# EAGLE board Blend V2.0 20170309 (EAGLE 6.6.0)
00: 00
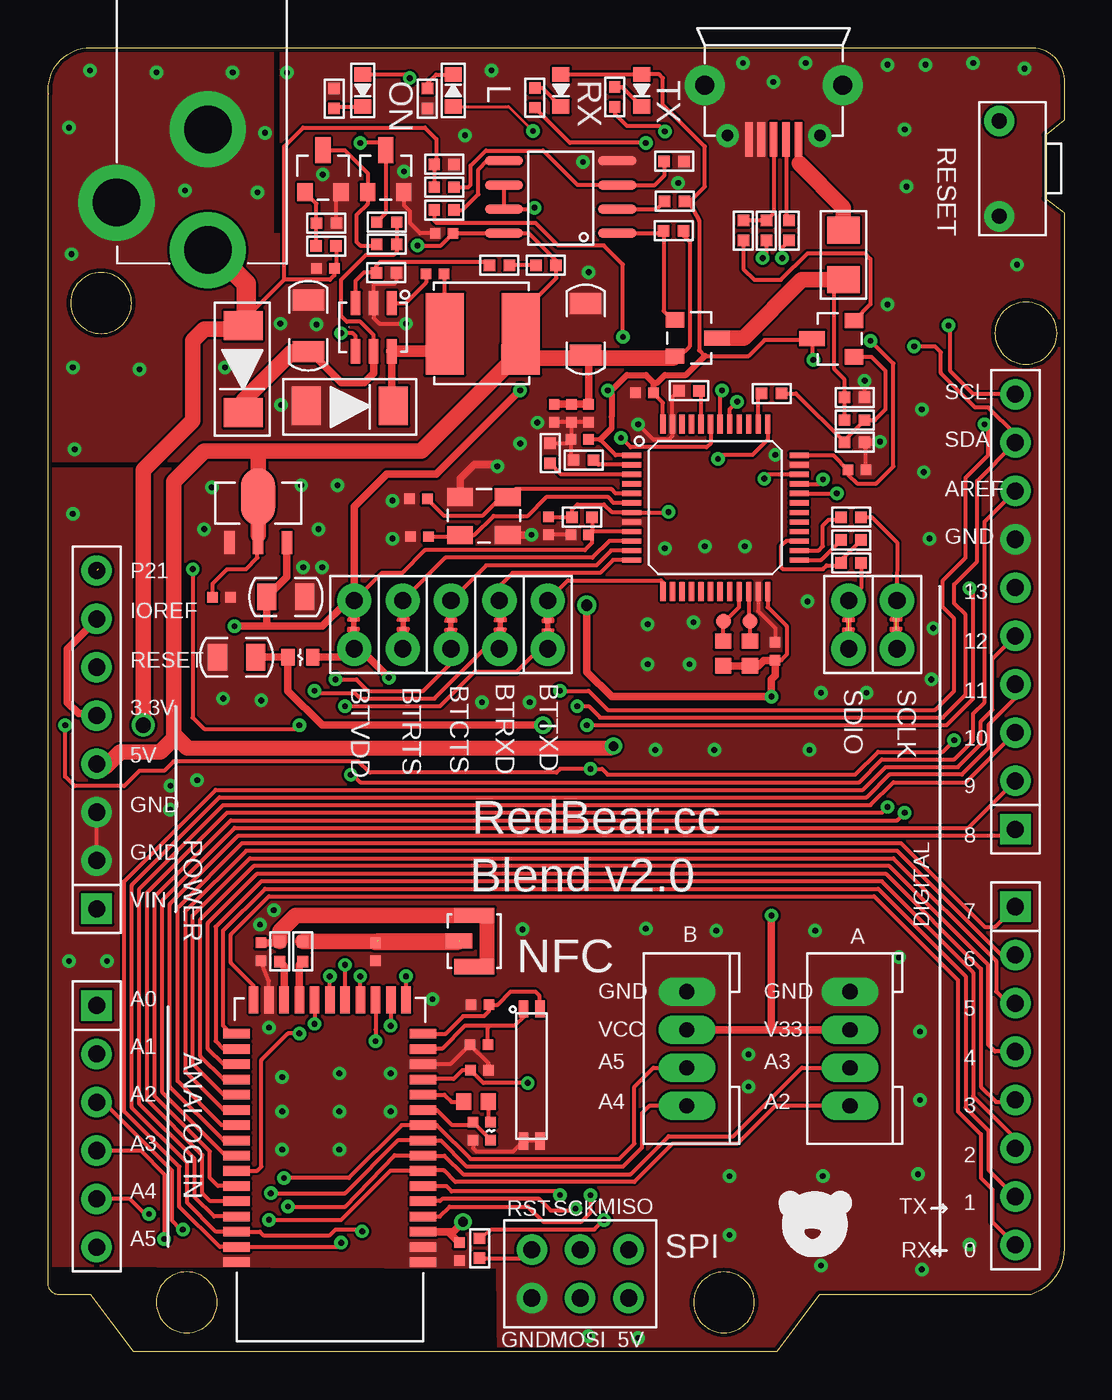
[diagram p0: board, top side]
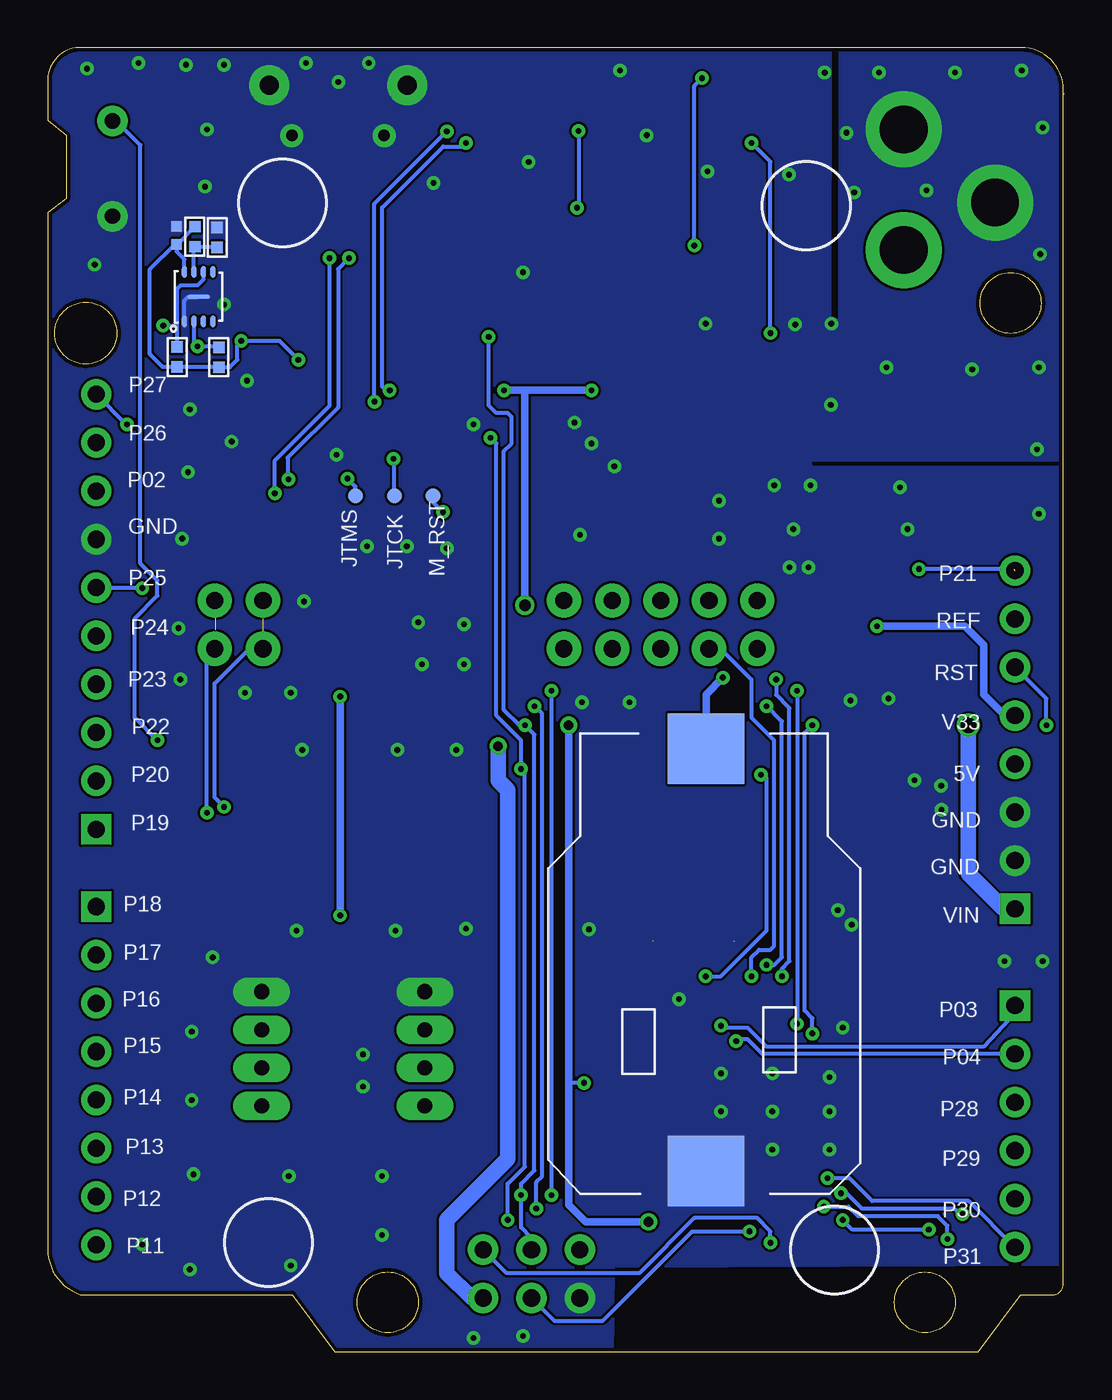
[diagram p1: board, bottom side, seen from below]

Size 53.4 x 68.54 mm. Coordinates in mm from the lower left corner, seen from the top.
Outline: 0.02,66.13 0.05,66.13 0,66.13
Outline: 0.63,3 arc-90 0.03,3.58 0.03,66.32 arc-90 2.25,68.54 51.75,68.54 arc-90 53.4,66.72 53.4,64.74 52.43,63.95 52.43,60.6 53.4,59.87 53.4,5.42 arc-72 51.67,3.01 40.55,3.01 38.31,0 4.52,0 2.27,3 0.63,3
Outline: 1.21,55.12 arc180 4.41,55.12 arc180 1.21,55.12
Outline: 49.76,53.54 arc180 53.03,53.54 arc180 49.76,53.54
Outline: 8.91,2.6 arc180 5.71,2.6 arc180 8.91,2.6
Outline: 37.13,2.6 arc180 33.93,2.6 arc180 37.13,2.6
Copper layers (1*16): Top 0.035mm / dielectric 1.5mm / Bottom 0.035mm
Design rules "MB-N2规则 *": minimum track width 5mil, minimum drill 11mil, track to track 5mil, track to pad 6mil, pad to pad 6mil, via to via 8mil, smd to smd 6mil, copper to edge 8mil, drill to drill 8mil, minimum pad ring 10mil, minimum via ring 8mil, stop-mask expansion 0mil, vias tented up to drill 0.45mm, thermal gap 8mil

## Footprints (pad centres in the part's own frame; a part is rotated, then mirrored left to right if it is on the bottom)
CONETER-4-2.0 = drill 0.8 pad 1.5 long: 1 -3,0; 2 -1,0; 3 1,0; 4 3,0
BAT = smd 3.7 x 4: P$1 -11.1,0; P$2 11.1,0
SIP-2 = drill 0.9 pad 1.8: 1 -1.27,0; 2 1.27,0
C-0402 = smd 0.55 x 0.55: 1 -0.47,0; 2 0.47,0
C0805 = smd 1 x 1.4: 1 -1,0; 2 1,0
C1206 = smd 1.1 x 1.65: 1 -1.35,0; 2 1.35,0
LED-0603 = smd 0.762 x 0.889: 1 -0.85,0; 2 0.85,0
D-1810 = smd 1.524 x 2.032: 1 -2.29,0; 2 2.29,0
PAIZHEN3X2PIN2.54 = drill 0.9 pad 1.6: 1 -2.54,-1.27; 2 0,-1.27; 3 2.54,-1.27; 4 2.54,1.27; 5 0,1.27; 6 -2.54,1.27
DC-005 = drill 2.5 pad 4: P$1 0,0.7; P$2 0,7.05; P$3 -4.8,3.2
PAIZHEN8P_2.54AA = drill 0.9 pad 1.6 square: 1 0,0 | drill 0.9 pad 1.6: 2 0,-2.54; 3 0,-5.08; 4 0,-7.62; 5 0,-10.16; 6 0,-12.7; 7 0,-15.24; 8 0,-17.78
PAIZHEN6P_2.54AA = drill 0.9 pad 1.6 square: 1 0,0 | drill 0.9 pad 1.6: 2 0,-2.54; 3 0,-5.08; 4 0,-7.62; 5 0,-10.16; 6 0,-12.7
PAIZHEN10P-2.54A = drill 0.9 pad 1.6 square: 1 0,0 | drill 0.9 pad 1.6: 2 0,-2.54; 3 0,-5.08; 4 0,-7.62; 5 0,-10.16; 6 0,-12.7; 7 0,-15.24; 8 0,-17.78; 9 0,-20.32; 10 0,-22.86
TP = smd 0.8 x 0.8: P$1 0,0
K2-1101F = drill 0.8 pad 1.6: 1 -2.5,1.05; 2 2.5,1.05
R0603 = smd 0.8 x 0.85: 1 -0.65,0; 2 0.65,0
R-0402S = smd 0.55 x 0.55: 1 -0.47,0; 2 0.47,0
L4X4 = smd 4.3 x 2: P$1 0,2; P$2 0,-2
R-0603A = smd 0.7 x 0.85: 1 -0.65,0; 2 0.65,0
MP2359 = smd 1.27 x 0.508: 1 -1.27,0.953; 2 -1.27,0; 3 -1.27,-0.953; 4 1.27,-0.953; 5 1.27,0; 6 1.27,0.953
IPEX = smd 0.8 x 1.4: 1 0,-0.8 | smd 0.8 x 2.1: 2 1.35,0; 3 -1.35,0
SOT-23 = smd 0.8 x 0.95: 1 -0.97,-0.9; 2 0.93,-0.9 | smd 0.8 x 1.35: 3 -0.018,1.301
R0402 = smd 0.6 x 0.6: 1 -0.525,0; 2 0.525,0
R1206A = smd 1.4 x 1.7: 1 -1.3,0; 2 1.3,0
LED0603 = smd 0.762 x 0.889: 1 -0.85,0; 2 0.85,0
TP_OPEN = smd 0.35 x 0.35: P$1 -0.32,0; P$2 0.32,0
LQFP-48-7X7 = smd 1 x 0.27: 1 -4.4,2.75; 2 -4.4,2.25; 3 -4.4,1.75; 4 -4.4,1.25; 5 -4.4,0.75; 6 -4.4,0.25; 7 -4.4,-0.25; 8 -4.4,-0.75; 9 -4.4,-1.25; 10 -4.4,-1.75; 11 -4.4,-2.25; 12 -4.4,-2.75; 25 4.4,-2.75; 26 4.4,-2.25; 27 4.4,-1.75; 28 4.4,-1.25; 29 4.4,-0.75; 30 4.4,-0.25; 31 4.4,0.25; 32 4.4,0.75; 33 4.4,1.25; 34 4.4,1.75; 35 4.4,2.25; 36 4.4,2.75 | smd 0.27 x 1: 13 -2.75,-4.4; 14 -2.25,-4.4; 15 -1.75,-4.4; 16 -1.25,-4.4; 17 -0.75,-4.4; 18 -0.25,-4.4; 19 0.25,-4.4; 20 0.75,-4.4; 21 1.25,-4.4; 22 1.75,-4.4; 23 2.25,-4.4; 24 2.75,-4.4; 37 2.75,4.4; 38 2.25,4.4; 39 1.75,4.4; 40 1.25,4.4; 41 0.75,4.4; 42 0.25,4.4; 43 -0.25,4.4; 44 -0.75,4.4; 45 -1.25,4.4; 46 -1.75,4.4; 47 -2.25,4.4; 48 -2.75,4.4
RBT07 = smd 1.4 x 0.5: 1 -0.649,13.085; 2 -0.649,12.285; 3 -0.649,11.485; 4 -0.649,10.685; 5 -0.649,9.885; 6 -0.649,9.085; 7 -0.649,8.285; 8 -0.649,7.485; 9 -0.649,6.685; 10 -0.649,5.885; 11 -0.649,5.085; 12 -0.649,4.285; 13 -0.649,3.485; 14 -0.649,2.685; 15 -0.649,1.885; 16 -0.649,1.085; 28 9.151,1.085; 29 9.151,1.885; 30 9.151,2.685; 31 9.151,3.485; 32 9.151,4.285; 33 9.151,5.085; 34 9.151,5.885; 35 9.151,6.685; 36 9.151,7.485; 37 9.151,8.285; 38 9.151,9.085; 39 9.151,9.885; 40 9.151,10.685; 41 9.151,11.485; 42 9.151,12.285; 43 9.151,13.085 | smd 0.5 x 1.4: 17 0.251,-0.7; 18 1.051,-0.7; 19 1.851,-0.7; 20 2.651,-0.7; 21 3.451,-0.7; 22 4.251,-0.7; 23 5.051,-0.7; 24 5.851,-0.7; 25 6.651,-0.7; 26 7.451,-0.7; 27 8.251,-0.7
CRY_7015_SMT = smd 0.9 x 0.5: 1 -3.52,-0.425; 2 3.42,-0.425; 3 3.42,0.425; 4 -3.52,0.425
USON8_A = smd 0.6 x 0.25: 1 -1.3,0.75; 2 -1.3,0.25; 3 -1.3,-0.25; 4 -1.3,-0.75; 5 1.3,-0.75; 6 1.3,-0.25; 7 1.3,0.25; 8 1.3,0.75 | smd 0.22 x 1.2: 9 0,0
MICRO_USB = smd 0.4 x 1.8: 1 1.3,0; 2 0.65,0; 3 0,0; 4 -0.65,0; 5 -1.3,0 | drill 0.6 pad 1.2: 6 2.425,0.2; 9 -2.425,0.2 | drill 1 pad 2.1: 7 3.625,2.85; 8 -3.625,2.85
SOT-89 = smd 0.55 x 1.2: 1 -1.5,-1.9; 3 1.5,-1.9 | smd 0.55 x 2: 2 0,-1.5 | smd 1.8 x 3: 4 0,0.5
SOP-8 = smd 2 x 0.5: 1 -2.97,1.905; 2 -2.97,0.635; 3 -2.97,-0.635; 4 -2.97,-1.905; 5 2.97,-1.905; 6 2.97,-0.635; 7 2.97,0.635; 8 2.97,1.905
CRY_3225_SMT = smd 1.35 x 0.95: 1 -1.25,-1; 2 1.25,-1; 3 1.25,1; 4 -1.25,1

## Placement (x,y rotation side)
A  SIP-42.0  [CONETER-4-2.0]  42.15,15.93 90 top
B  SIP-42.0  [CONETER-4-2.0]  33.58,15.93 90 top
BAT  BAT  [BAT]  18.81,20.6 270 bottom
BT-VDD  SIP-22.54  [SIP-2]  16.11,38.22 90 top
C1  1uF  [C-0402]  22.36,11.61 90 top
C2  0.1uF  [C-0402]  22.7,14.81 0 top
C3  15p  [C-0402]  22.66,16.15 0 top
C4  15p  [C-0402]  22.71,18.25 180 top
C5  nc  [C-0402]  11.21,21.03 90 top
C6  nc  [C-0402]  17.21,21.04 270 top
C7  0.1uF  [C-0402]  21.63,5.27 270 top
C8  0.1uF  [C-0402]  46.62,58.67 270 bottom
C9  4.7uF  [C-0402]  27.95,47.95 0 top
C10  10uF  [C0805]  12.52,39.67 0 top
C11  20p  [C-0402]  19.48,44.83 180 top
C12  20p  [C-0402]  19.54,42.85 0 top
C13  0.1uF  [C-0402]  26.31,43.41 90 top
C14  0.1uF  [C-0402]  27.95,42.95 180 top
C15  0.1uF  [C-0402]  38.21,36.83 270 top
C16  0.1uF  [C-0402]  42.52,46.35 0 top
C17  0.1uF  [C-0402]  9.13,39.65 0 top
C18  47uF  [C1206]  28.27,53.73 270 top
C19  10nF  [C-0402]  20.36,56.65 0 top
C20  0.1uF  [C-0402]  28.41,49.33 90 top
C21  100pF  [C-0402]  27.52,49.33 90 top
C22  33pF  [C-0402]  26.62,49.33 90 top
C23  22uF  [C0805]  9.93,36.51 180 top
C24  0.1uF  [C-0402]  14.59,56.95 0 top
C25  0.1uF  [C-0402]  31.35,50.39 180 top
C26  1uF  [C-0402]  20.84,58.79 0 top
C41  10uF  [C1206]  13.7,53.93 90 top
D1  LAN  [LED-0603]  21.31,66.29 90 top
D3  IN5819  [D-1810]  15.87,49.71 0 top
D4  green  [LED-0603]  16.55,66.29 270 top
HEAD-2*1  HEAD-23  [PAIZHEN3X2PIN2.54]  27.98,4.1 0 top
IN5819  D2  [D-1810]  10.27,51.64 270 top
J5  DC-JACK-3P  [DC-005]  8.42,57.2 0 top
J6  SIP-8SIP-8AA  [PAIZHEN8P_2.54AA]  50.84,23.4 0 top
J7  SIP-6SIP-6AA  [PAIZHEN6P_2.54AA]  2.58,18.2 0 top
J8  SIP-1010P_2.54A  [PAIZHEN10P-2.54A]  50.84,27.47 180 top
J9  SIP-8SIP-8AA  [PAIZHEN8P_2.54AA]  2.58,23.28 180 top
JTCK  TPTP  [TP]  35.17,44.99 0 bottom
JTMS  TPTP  [TP]  37.23,44.99 0 bottom
K-1  K-1811  [K2-1101F]  48.94,62.18 270 top
L1  10uH  [R0603]  22.5,13.16 180 top
L2  15nH  [R-0402S]  23.27,11.61 90 top
L3  4.7UH  [L4X4]  22.86,53.5 90 top
L20  10uH  [R-0603A]  13.27,36.51 0 top
M_RST  TPTP  [TP]  33.16,44.99 0 bottom
MP2359  MP2359  [MP2359]  17.13,53.85 270 top
NFC  IPEXIPEX  [IPEX]  22.41,21.59 270 top
NMOS2  Q2  [SOT-23]  17.78,61.85 0 top
NMOS3  Q1  [SOT-23]  14.49,61.85 0 top
Q4  N-MOS  [SOT-23]  41.46,53.26 90 top
Q7  PMOS  [SOT-23]  33.86,53.26 270 top
R1  0R  [R0402]  13.4,21.04 90 top
R2  4.7K NC  [R0402]  44.4,52.27 270 bottom
R3  0R  [R0402]  12.2,21.04 90 top
R4  4.7K NC  [R0402]  46.59,52.29 270 bottom
R5  NC  [R0402]  45.66,58.61 90 bottom
R6  NC  [R0402]  44.5,58.57 270 bottom
R7  10k  [R0402]  28.16,46.87 0 top
R8  nc  [R0402]  26.4,47.23 270 top
R9  10k  [R0402]  28.08,43.87 0 top
R10  NC  [R0603]  35.49,36.71 90 top
R11  NC  [R0603]  36.9,36.71 90 top
R12  100R  [R0402]  42.22,41.47 180 top
R13  100R  [R0402]  42.22,43.87 180 top
R14  100R  [R0402]  42.22,42.67 180 top
R15  10k  [R0402]  29.8,65.95 90 top
R16  10k  [R0402]  25.59,65.91 90 top
R17  4.7k  [R0402]  33.7,50.51 180 top
R18  1.5K  [R0402]  36.55,58.93 270 top
R19  33R  [R0402]  37.76,58.93 270 top
R20  33R  [R0402]  38.95,58.93 270 top
R21  10K  [R0402]  42.4,48.97 180 top
R22  36K  [R0402]  42.4,47.81 180 top
R23  100R  [R0402]  38.03,50.37 180 top
R24  100K  [R0402]  32.88,58.92 0 top
R25  11K  [R0402]  14.63,58.12 180 top
R26  10K  [R0402]  20.84,62.41 0 top
R27  2.7K  [R0402]  14.64,59.32 0 top
R28  100K  [R0402]  17.81,58.21 180 top
R29  100K  [R0402]  17.81,59.37 180 top
R30  0R  [R0402]  26.17,57.11 180 top
R31  49.9K  [R0402]  23.73,57.11 180 top
R32  9.53K  [R0402]  17.8,56.71 0 top
R33  10K  [R0402]  15.05,65.87 90 top
R34  33R  [R0402]  32.94,60.47 180 top
R35  10K  [R0402]  20.84,61.21 0 top
R36  10K  [R0402]  32.91,62.57 180 top
R37  0R  [R0402]  20.84,60.01 0 top
R38  10K  [R0402]  19.95,65.87 90 top
R39  33R  [R0402]  22.7,5.45 270 top
R40  4.7K  [R0402]  42.4,50.16 180 top
RES1  500mA fuse  [R1206A]  41.81,57.65 270 top
RX  GREEN  [LED0603]  26.97,66.29 270 top
S1  SIP-22.54  [SIP-2]  18.65,38.22 90 top
S2  SIP-22.54  [SIP-2]  21.19,38.22 90 top
S3  SIP-22.54  [SIP-2]  23.73,38.22 90 top
S4  SIP-22.54  [SIP-2]  26.27,38.22 90 top
S5  SIP-22.54  [SIP-2]  44.62,38.22 90 top
S6  SIP-22.54  [SIP-2]  42.08,38.22 90 top
S55  TP_OPEN  [TP_OPEN]  16.07,38.23 90 top
T1  TP_OPEN  [TP_OPEN]  18.67,38.23 270 top
T2  TP_OPEN  [TP_OPEN]  21.17,38.19 270 top
T3  TP_OPEN  [TP_OPEN]  23.77,38.21 270 top
T4  TP_OPEN  [TP_OPEN]  26.27,38.17 270 top
T5  TP_OPEN  [TP_OPEN]  44.58,38.25 90 top
T6  TP_OPEN  [TP_OPEN]  42.08,38.21 90 top
TP1  TPTP  [TP]  35.49,38.39 0 top
TP2  TPTP  [TP]  36.9,38.39 0 top
TX  BLUE  [LED0603]  31.22,66.29 270 top
U1  STM32F103LQFP48  [LQFP-48-7X7]  35.08,44.37 0 top
U11  MB-N2  [RBT07]  19.08,17.8 180 top
U$2  CRY_7015  [CRY_7015_SMT]  25.43,14.5 270 top
U$3  APPLE_ICUSON8A  [USON8_A]  45.46,55.45 90 bottom
U$15  MICRO_USBMICRO_USB  [MICRO_USB]  38.14,63.72 0 top
U$16  XC6203SOT89  [SOT-89]  11.06,44.43 0 top
U$19  SGM358  [SOP-8]  26.96,60.69 180 top
Y1  16MH  [CRY_3225_SMT]  22.92,43.93 0 top

## Library data of the parts
A B BAT BT-VDD C10 C18 C23 C41 D1 D3 D4 HEAD-2*1 IN5819 J5-J9 JTCK JTMS K-1 L3 L20 M_RST MP2359 NFC NMOS2 NMOS3 Q4 Q7 R1-R9 R12-R40 RES1 RX S1-S6 S55 T1-T6 TP1 TP2 TX U1 U11 U$2 U$3 U$15 U$16 U$19 Y1 = RedBeard
C1-C9 C11-C17 C19-C22 C24-C26 L1 L2 R10 R11 = Nano2

## Nets
+3V3: A.3 B.3 BT-VDD.2 C8.2 C9.2 C10.1 C14.1 C15.2 C16.1 C25.1 J9.5 J9.7 Q4.3 R2.2 R4.2 R5.2 R9.2 R10.1 R11.1 R34.1 RX.1 S55.P$2 TX.1 U1.1 U1.9 U1.24 U1.36 U1.48 U$3.8 U$16.3
+5V: C17.1 C18.2 C20.2 C21.2 C22.2 C26.2 D4.1 HEAD-2*1.3 J9.4 L3.P$2 Q7.2 R24.2 R30.1 U$16.2 U$19.8
AGND: A.4 B.4 BAT.P$2 C1.1 C2.2 C3.1 C4.2 C5.1 C6.2 C7.2 C8.1 C9.1 C10.2 C11.2 C12.1 C13.1 C14.2 C15.1 C16.2 C17.2 C18.1 C20.1 C21.1 C22.1 C23.2 C24.1 C25.2 C26.1 C41.2 D3.1 HEAD-2*1.1 J5.P$2 J5.P$3 J8.7 J9.2 J9.3 K-1.2 MP2359.2 NMOS2.2 NMOS3.2 R6.1 R7.1 R8.1 R17.2 R22.1 R26.2 R27.2 R32.2 R33.2 R36.1 R38.1 R40.1 U1.8 U1.23 U1.35 U1.47 U11.1 U11.2 U11.14 U11.26 U11.43 U$2.2 U$2.3 U$3.1 U$3.9 U$15.4 U$15.5 U$15.6 U$15.7 U$15.8 U$15.9 U$16.1 U$19.4 Y1.2 Y1.4
CTS/P07: S2.1 T2.P$2 U11.22
DN: R20.2 U1.32
DP: R19.2 U1.33
IN1: U$16.4
M/RST: C13.2 M_RST.P$1 R9.1 U1.7
MP2359: C19.1 MP2359.1
N$1: L1.1 L2.2
N$2: L1.2 U11.12
N$3: C1.2 L2.1 U11.11
N$5: C3.2 U11.15 U$2.1
N$6: C4.1 U11.16 U$2.4
N$7: C5.2 NFC.2 NFC.3 R3.2
N$8: C6.1 NFC.1 R1.2
N$10: R10.2 TP1.P$1 U1.21
N$11: R5.1 R6.2 U$3.7
N$12: C11.1 U1.5 Y1.3
N$13: R7.2 U1.2
N$14: R8.2 U1.3
N$15: C12.2 U1.6 Y1.1
N$17: R11.2 TP2.P$1 U1.22
N$18: Q4.2 R18.2
N$19: Q4.1 R21.1 R22.2 R23.1
N$20: S4.2 T4.P$1 U1.13
N$21: R18.1 R19.1 U$15.3
N$22: R14.2 U1.25
N$23: R15.1 U1.41
N$24: R16.1 U1.42
N$25: R20.1 U$15.2
N$26: R17.1 U1.44
N$29: BAT.P$1 BT-VDD.1 L20.2 S55.P$1
N$30: NMOS3.1 R25.2 R27.1
N$31: RES1.1 U$15.1
N$32: NMOS2.1 NMOS3.3 R28.2
N$33: R34.2 U$19.2
N$34: R35.2 R36.2 U$19.3
N$35: D4.2 R33.1
N$36: MP2359.4 NMOS2.3 R29.2
N$37: D1.1 U$19.6 U$19.7
N$39: MP2359.3 R31.2 R32.1
N$40: R30.2 R31.1
N$41: D1.2 R38.2
N$42: C19.2 D3.2 L3.P$1 MP2359.6
N$43: R37.2 U$19.5
N$45: HEAD-2*1.6 R39.2
P02_AREF: J8.8 U11.17
P03_A0: J7.1 U11.18
P04_A1: J7.2 U11.19
P09: R1.1 U11.24
P10: R3.1 U11.25
P11_D0/RX: J6.8 U11.27
P12_D1/TX: J6.7 U11.28
P13_D2/SDA: J6.6 U11.29
P14_D3/SCL: J6.5 U11.30
P15_D4: J6.4 U11.31
P16_D5: J6.3 U11.32
P17_D6: J6.2 U11.33
P18_D7: J6.1 U11.34
P19_D8: J8.1 U11.35
P20_D9: J8.2 U11.36
P21: J9.8 U11.37
P22_D10: J8.3 U11.40
P23_D11: HEAD-2*1.2 J8.4 U11.41
P24_D12: HEAD-2*1.4 J8.5 U11.42
P25_D13: HEAD-2*1.5 J8.6 R37.1 U11.4
P26_SDA1: J8.9 R2.1 U11.5 U$3.2
P27_SCL1: J8.10 R4.1 U11.6 U$3.6
P28_A2: A.1 J7.3 U11.7
P29_A3: A.2 J7.4 U11.8
P30_A4: B.1 J7.5 U11.9
P31_A5: B.2 J7.6 U11.10
PA0: S1.2 T1.P$1 U1.10
PA1: S2.2 T2.P$1 U1.11
PA2: S3.2 T3.P$1 U1.12
RESET: J9.6 K-1.1 R39.1 U1.43
RTS/P05: S1.1 T1.P$2 U11.20
RX: R16.2 RX.2
RXD/P08: S3.1 T3.P$2 U11.23
SCLK: R13.1 S5.1 S5.2 T5.P$1 T5.P$2 U11.38
SDIO: R12.1 S6.1 S6.2 T6.P$1 T6.P$2 U11.39
STM_JTCK: JTCK.P$1 U1.37
STM_JTMS: JTMS.P$1 U1.34
SWDCLK: R13.2 U1.26
SWDIO: R12.2 R14.1 U1.27
TX: R15.2 TX.2
TXD/P06: S4.1 T4.P$2 U11.21
USB5V: Q7.3 R21.2 R40.2 RES1.2
USB_RENUMN: R23.2 U1.38
USBPON: Q7.1 R24.1 U$19.1
VDD: C2.1 C7.1 C23.1 L20.1 U11.3 U11.13
VIN: C24.2 IN5819.1 J5.P$1 J9.1 R25.1 R26.1 R35.1
VIN+: C41.1 IN5819.2 MP2359.5 R28.1 R29.1

## Tracks (layer width: path | path; a pad name or v marks a point on that pad's centre or on a via)
+3V3  (via drill 0.3 pad 0.61, 0.6 pad 0.61)
  Top 0.2: R34.1 33.76,60.47 | 33.76,60.47 34.52,61.24 34.52,63.34 32.33,65.54 32.33,66.94 32.12,67.14 TX.1 RX.1 | 40.16,53.17 Q4.3 40.16,52.2 v40.23,52.14 | 40.16,53.17 40.12,53.14 | 40.16,53.17 37.66,53.17 36.83,52.34 34.52,52.34 34.23,52.64 34.23,59.44 33.76,60.31 33.76,60.47 | U1.48 32.33,49.89 C25.1 | U1.1 29.84,47.12 29.02,47.94 C9.2 | v29.42,50.54 29.62,50.34 | v43.23,53.14 44.43,51.94 44.43,46.54 43.52,45.64 42.52,45.64 42.05,46.12 C16.1 41.27,47.12 U1.36 | U1.9 28.59,43.12 | 28.59,43.12 28.59,42.51 28.23,42.14 19.82,42.14 18.62,40.94 17.56,40.94 BT-VDD.2 | R9.2 28.6,43.12 28.59,43.12 | 28.59,43.12 C14.1 | U1.24 37.83,39.14 38.83,38.14 38.83,36.64 38.55,36.36 C15.2
  Top 0.3: 29.62,49.15 29.62,48.54 29.02,47.94
  Top 0.305: 29.62,49.15 29.62,50.34 29.62,50.54 30.42,51.34 31.42,51.34 31.83,50.94 | 31.83,50.94 C25.1 | 31.83,50.94 32.02,50.94 32.42,51.34 33.52,51.34 34.52,52.34
  Top 0.406: U$16.3 12.56,40.72 C10.1 11.52,38.23 11.43,38.14 | BT-VDD.2 16.12,38.59 S55.P$2 | v9.82,38.14 11.43,38.14 | 11.43,38.14 14.43,38.14 15.62,39.34 15.96,39.34 BT-VDD.2 | J9.7 2.58,38.49 1.02,36.94 1.02,34.14 1.62,33.54 2.48,33.54 J9.5 | B.3 38.02,16.93 38.02,16.94 38.02,17.14 | 38.02,17.14 v38.02,22.94 | A.3 38.23,16.93 38.02,17.14 | R10.1 R11.1 37.34,36.06 37.62,36.34 38.2,36.34 C15.2 38.23,35.54 38.02,35.34 v38.02,34.44 29.62,34.44 28.33,35.74 v28.33,39.24 | BT-VDD.2 16.12,44.43 17.82,46.14 20.42,46.14 v24.83,50.54
  Bottom 0.2: U$3.8 46.21,57.42 46.62,57.83 C8.2 | C8.2 46.59,58.2 R5.2 | v40.23,52.14 41.23,53.14 v43.23,53.14 43.43,52.94 43.43,52.14 43.82,51.74 R2.2 46.58,51.74 R4.2 47.35,51.76 48.02,52.44 48.02,56.89 46.72,58.2 C8.2
  Bottom 0.406: J9.5 3.13,33.44 4.22,34.54 4.22,37.14 5.22,38.14 v9.82,38.14 | v38.02,22.94 v38.02,34.44 | v24.83,50.54 28.33,50.54 | 28.33,50.54 v29.42,50.54 | v28.33,39.24 28.33,50.54
+5V  (via drill 0.3 pad 0.61, 0.5 pad 0.81)
  Top 0.2: C17.1 8.66,40.38 9.43,41.14 10.43,41.14 11.02,41.74 11.02,42.89 U$16.2 | C26.2 U$19.8 25.28,58.78 26.7,57.36 R30.1 26.73,57.08 26.73,56.44 25.83,55.54 24.92,55.54 24.92,53.56 L3.P$2 | C26.2 21.3,58.86 | D4.1 18.82,67.14 v19.02,66.94 | R24.2 33.41,58.65 33.73,58.34 33.73,52.84 33.22,52.33 Q7.2 | v19.42,58.14 20.66,58.14 C26.2
  Top 0.406: C22.2 C21.2 C20.2 28.41,52.23 C18.2
  Top 0.8: 7.32,31.74 29.62,31.74 v29.73,31.84
  Top 0.813: 3.19,30.9 3.82,31.54 5.92,31.54 6.62,32.24 6.62,32.44 | 3.19,30.9 3.02,30.74 | 24.23,52.34 24.33,52.23 28.41,52.23 32.86,52.23 Q7.2 | 24.23,52.34 24.23,52.86 L3.P$2 | 24.23,52.34 24.23,51.94 19.62,47.34 11.02,47.34 | 6.62,32.44 6.62,45.74 8.22,47.34 11.02,47.34 | J9.4 3.19,30.9 | U$16.2 11.06,47.3 11.02,47.34 | 7.32,31.74 6.62,32.44
  Bottom 0.2: v19.42,58.14 19.42,66.54 v19.02,66.94
  Bottom 0.813: HEAD-2*1.3 31.12,2.83 32.42,4.14 32.42,6.94 29.23,10.14 29.23,29.54 29.73,30.04 v29.73,31.84
AGND  (via drill 0.3 pad 0.55, 0.3 pad 0.61)
  Top 0.15: C24.1 14.12,57.03
  Top 0.2: R32.2 18.32,56.23 18.23,56.14 17.23,56.14 17.13,56.04 MP2359.2 17.13,54.33 17.42,54.04 v18.82,54.04 | U11.14 20.1,15.12 20.12,15.14 21.17,15.14 C3.1 23.16,15.17 C2.2 | C1.1 22.36,10.71 22.52,10.54 24.46,10.54 U$2.2 U$2.3 | U1.23 37.33,38.94 38.23,38.04 C15.1 | C14.2 C13.1 | R17.2 32.83,50.16 U1.47 32.83,48.14 32.62,47.94 31.83,47.94 v31.02,48.74 | C20.1 C21.1 | C21.1 27.52,47.98 C9.1 | C21.1 C22.1 | C9.1 27.48,47.01 R7.1 | R8.1 27.29,47.75 C9.1 | C16.2 42.98,47.74 R22.1 | R40.1 42.92,50.84 v42.93,51.04 | C26.1 19.57,58.79 19.02,59.34 19.02,59.94 18.71,60.25 NMOS2.2 | J9.2 J9.3 | R27.2 15.17,60.7 NMOS3.2 | U11.26 11.63,19.5 C5.1
  Top 0.406: R22.1 43.7,47.81 v43.73,47.84 | Y1.4 21.67,45.88 22.42,46.64 23.52,46.64 v23.62,46.54 | Y1.2 25.23,42.93 v25.42,42.94
  Bottom 0.2: U$3.1 46.21,55.25 46.02,55.44 45.48,55.44 U$3.9
  other vias: 28.42,56.74 12.22,54.04 14.46,61.87 2.22,67.34 5.72,67.24 9.72,67.24 1.12,64.34 1.25,57.69 1.32,51.74 4.82,51.64 1.42,47.44 1.32,44.04 38.12,66.74 36.52,67.74 39.83,67.74 44.12,67.64 46.12,67.64 48.62,67.74 51.33,67.44 45.93,49.54 46.02,46.24 46.33,42.74 36.62,42.34 34.52,42.34 32.42,42.24 20.23,18.54 38.23,47.14 14.12,53.99 45.02,64.24 45.12,61.24 25.73,48.84 24.83,47.74 18.12,44.74 18.12,42.74 13.43,41.24 14.43,41.24 11.62,17.04 12.32,14.44 15.32,14.64 15.32,10.64 12.32,10.64 18.73,62.04 11.43,64.07 21.92,63.94 23.33,67.34 12.57,67.23 11.02,60.94 7.22,61.04 28.12,62.54 44.12,55.04 50.93,57.14 12.25,49.77 9.32,51.74 13.32,45.54 15.22,45.54 14.22,43.24 8.62,45.44 8.22,43.24 9.22,34.34 11.22,34.24 22.82,34.14 25.33,34.14 31.92,31.64 35.02,31.64 40.02,31.64 31.52,38.24 31.52,36.14 33.73,36.14 33.92,38.34 40.62,34.64 39.93,39.44 43.02,34.64 46.43,35.34 46.52,38.04 31.42,22.24 35.12,22.14 40.33,22.14 44.73,20.74 45.83,16.84 45.83,13.24 45.73,9.34 45.93,4.34 48.43,5.64 40.73,9.24 35.83,9.24 35.83,6.14 40.62,4.54 28.42,0.84 31.02,0.74 18.02,14.64 18.02,12.64 15.32,12.64 12.32,12.64 3.12,20.54 1.12,20.54 33.12,61.44 36.83,15.64 36.83,13.94 11.15,22.45 11.88,23.21 6.46,29.75 6.44,28.5 7.86,30.04 24.95,22.21
  pour Bottom (no thermals): -0.22,46.47 13.29,46.47 13.3,46.88 -0.29,46.88 -0.29,68.85 11.79,68.99 11.81,54.25 12.27,54.23 12.24,68.93 53.59,68.93 53.45,-0.4 23.71,-0.4 23.66,4.49 -0.22,4.6
  pour Top (no thermals): -0.23,46.41 7.07,46.41 7.09,46.82 -0.31,46.82 -0.31,68.79 11.8,68.99 11.8,58.75 12.27,58.73 12.27,68.93 53.59,68.87 53.44,-0.46 23.7,-0.46 23.66,4.43 -0.23,4.54
CTS/P07  (via drill 0.3 pad 0.61)
  Top 0.2: U11.22 v14.83,19.73 v14.82,19.74 | v15.12,35.34 16.23,35.34 16.82,34.74 19.73,34.74 21.23,36.24 21.23,36.92 S2.1
  Top 0.406: S2.1 21.2,37.85 T2.P$2
  Bottom 0.2: v14.82,19.74 14.82,20.14 14.43,20.54 14.43,33.84 15.12,34.54 v15.12,35.34
DN  (via drill 0.3 pad 0.61)
  Top 0.2: U1.32 v41.45,45.12 v41.46,45.12 | v38.59,57.48 38.59,58.04 R20.2
  Bottom 0.2: v38.59,57.48 38.59,49.72 41.45,46.85 v41.45,45.13 v41.46,45.12
DP  (via drill 0.3 pad 0.61)
  Top 0.2: R19.2 37.76,57.72 v37.57,57.48 | U1.33 40.5,45.62 v40.74,45.85
  Bottom 0.2: v40.74,45.85 40.79,45.9 40.79,46.99 38.14,49.63 38.14,56.91 v37.57,57.48
M/RST  (via drill 0.3 pad 0.61)
  Top 0.2: v32.62,44.14 32.6,44.12 U1.7 30.66,44.14 29.62,44.14 29.23,44.54 27.83,44.54 27.55,44.26 R9.1 27.54,43.88 C13.2
  Bottom 0.2: M_RST.P$1 33.16,44.67 v32.62,44.14
MP2359
  Top 0.2: MP2359.1 18.81,55.12 19.88,56.2 C19.1
N$1
  Top 0.2: L1.1 23.16,12.1 L2.2
N$2
  Top 0.2: U11.12 20.85,13.52 21.23,13.14 21.84,13.14 L1.2
N$3
  Top 0.2: U11.11 20.45,12.72 21.23,11.94 22.31,11.94 C1.2 22.36,12.06 L2.1 23.27,11.06
N$5
  Top 0.2: U$2.1 25.01,17.62 24.52,17.14 23.23,17.14 | 23.23,17.14 21.92,17.14 20.73,15.94 19.75,15.94 U11.15 | C3.2 23.12,17.04 23.23,17.14
N$6
  Top 0.2: U11.16 20.9,16.72 21.82,17.64 22.92,17.64 23.19,17.9 C4.1 23.63,18.25 24.33,18.94 25.62,18.94 25.83,18.74 25.83,18.05 U$2.4
N$7
  Top 0.406: C5.2 12.13,21.5 R3.2
  Top 0.8: NFC.3 23.05,22.94 23.06,22.93 23.06,20.28 23.02,20.23 22.43,20.23 NFC.2
  Top 0.813: R3.2 12.2,22.11 13.02,22.94 21.59,22.94 NFC.3
N$8  (2 unrouted)
  Top 0.813: R1.2 17.16,21.56 C6.1 21.53,21.51 NFC.1 | 17.3,21.58 NFC.1 | 17.36,21.6 21.67,21.6
N$10
  Top 0.2: U1.21 36.33,39.14 35.58,38.39 TP1.P$1 R10.2
N$11
  Bottom 0.2: U$3.7 45.71,58.03 R5.1 44.54,58.08 R6.2
N$12
  Top 0.2: C11.1 20.82,43.94 22.82,43.94 23.82,44.93 Y1.3 | 24.36,45.12 Y1.3 | U1.5 29.84,45.12 29.62,45.34 24.58,45.34 Y1.3
N$13
  Top 0.2: U1.2 28.93,46.62 R7.2
N$14
  Top 0.2: U1.3 26.98,46.12 R8.2
N$15
  Top 0.2: C12.2 21.59,42.85 Y1.1 22.42,42.93 23.42,43.94 25.23,43.94 26.23,44.94 29.42,44.94 29.74,44.62 U1.6 30.66,44.64
N$17
  Top 0.2: U1.22 36.83,38.46 TP2.P$1 R11.2
N$18
  Top 0.2: R18.2 36.55,56.91 37.12,56.34 38.52,56.34 39.93,57.74 42.93,57.74 43.23,57.44 43.23,55.05 Q4.2
N$19
  Top 0.2: R23.1 39.31,50.37 R22.2 41.87,47.92 R21.1 43.45,48.97 44.02,49.54 44.02,51.54 43.27,52.29 Q4.1
N$20
  Top 0.2: S4.2 26.75,39.97 26.76,39.97 27.33,40.54 32.23,40.54 32.33,40.44 U1.13
  Top 0.406: S4.2 T4.P$1 | T4.P$1
N$21
  Top 0.2: U$15.3 38.14,59.84 R19.1 R18.1
N$22
  Top 0.2: U1.25 40.64,41.62 R14.2
N$23  (via drill 0.3 pad 0.55)
  Top 0.2: U1.41 35.83,49.54 v36.23,49.94 | R15.1 29.8,65.07 30.42,64.44 32.12,64.44 v32.42,64.14
  Bottom 0.2: v36.23,49.94 36.23,60.34 v32.42,64.14
N$24  (via drill 0.3 pad 0.55)
  Top 0.2: U1.42 35.33,50.44 v35.42,50.54 | v31.42,63.54 27.44,63.54 R16.1
  Bottom 0.2: v35.42,50.54 35.62,50.54 35.83,50.74 35.83,60.14 32.62,63.34 31.62,63.34 v31.42,63.54
N$25
  Top 0.2: U$15.2 38.79,59.62 R20.1
N$26
  Top 0.2: U1.44 34.33,50.4 R17.1
N$29  (via drill 0.3 pad 0.55)
  Top 0.406: L20.2 15.67,36.51 | 15.67,36.51 BT-VDD.1 16.07,36.99 S55.P$1 | 15.67,36.51 16.86,36.51 v17.92,35.44
  Bottom 0.406: BAT.P$1 18.81,34.56 v17.92,35.44
N$30
  Top 0.2: NMOS3.1 14.12,60.35 R27.1 R25.2
N$31
  Top 0.406: U$15.1 39.44,62.51 39.48,62.47
  Top 0.813: RES1.1 41.81,60.14 39.48,62.47
N$32
  Top 0.2: NMOS3.3 15.61,63.15 16.82,61.94 16.82,60.96 NMOS2.1 16.81,60.33 16.23,59.74 16.23,58.34 16.42,58.14 17.26,58.14 R28.2
N$33
  Top 0.2: U$19.2 31.99,60.05 R34.2
N$34
  Top 0.2: R35.2 22.09,61.21 22.23,61.34 22.23,62.34 23.02,63.14 26.02,63.14 27.83,61.34 29.91,61.34 U$19.3 31.91,61.32 32.39,61.8 R36.2
N$35
  Top 0.15: 15.15,65.44 R33.1
  Top 0.2: 15.15,65.44 D4.2
N$36  (via drill 0.3 pad 0.61)
  Top 0.2: R29.2 17.77,59.84 NMOS2.3 17.77,63.3 17.52,63.54 v16.42,63.54 | MP2359.4 16.18,53.39 16.02,53.54 v15.42,53.54
  Bottom 0.2: v15.42,53.54 15.42,62.54 v16.42,63.54
N$37  (via drill 0.3 pad 0.61)
  Top 0.15: D1.1 24.22,65.44 v25.51,64.16
  Top 0.2: v25.59,60.13 25.51,60.05 U$19.7 U$19.6
  Bottom 0.2: v25.51,64.16 25.51,60.21 v25.59,60.13
N$39
  Top 0.2: MP2359.3 16.18,56.29 16.62,56.74 17.24,56.74 R32.1 | R32.1 17.27,56.78 | R31.2 23.23,57.29 17.48,57.29 17.27,57.08 R32.1
N$40
  Top 0.2: R30.2 R31.1
N$41
  Top 0.15: R38.2 19.95,66.57 | D1.2
  Top 0.2: 19.95,66.57 19.95,66.67 20.41,67.13 D1.2
N$42
  Top 0.2: L3.P$1 20.86,56.81 C19.2
  Top 0.406: MP2359.6 18.08,49.79 D3.2
  Top 0.61: MP2359.6 19.95,52.58 L3.P$1
N$43
  Top 0.2: U$19.5 23.08,62.59 22.62,62.14 22.62,60.84 21.8,60.01 R37.2
N$45
  Top 0.2: R39.2 24.99,4.92 HEAD-2*1.6
P02_AREF  (via drill 0.3 pad 0.61)
  Top 0.2: U11.17 18.83,19.53 v18.82,19.74 | v15.92,30.34 16.02,30.34 16.42,29.94 42.62,29.94 43.83,31.14 47.62,31.14 48.62,32.14 48.62,33.54 49.23,34.14 49.23,43.63 J8.8
  Bottom 0.2: v18.82,19.74 18.02,19.74 15.62,22.14 15.62,30.14 v15.92,30.34
P03_A0  (via drill 0.3 pad 0.61)
  Top 0.2: U11.18 18.03,17.54 v18.02,17.14
  Bottom 0.2: J7.1 2.58,17.78 4.22,16.04 15.62,16.04 16.62,17.04 17.92,17.04 v18.02,17.14
P04_A1  (via drill 0.3 pad 0.61)
  Top 0.2: U11.19 17.23,16.94 v17.23,16.34
  Bottom 0.2: J7.2 15.85,15.66 16.62,16.44 17.12,16.44 v17.23,16.34
P09
  Top 0.406: U11.24 13.23,20.34 R1.1
P10
  Top 0.406: U11.25 12.43,20.27 R3.1
P11_D0/RX
  Top 0.2: U11.27 10.83,19.24 9.62,20.45 9.62,21.94 11.62,23.94 43.43,23.94 47.83,19.54 47.83,12.64 49.02,11.44 49.02,9.14 49.62,8.54 49.62,6.84 J6.8
P12_D1/TX
  Top 0.2: U11.28 9.65,16.72 9.22,17.14 9.22,22.14 11.43,24.34 43.62,24.34 48.23,19.74 48.23,12.84 49.43,11.64 49.43,9.58 J6.7
P13_D2/SDA
  Top 0.2: U11.29 9.91,15.94 9.22,15.94 8.82,16.34 8.82,22.34 11.22,24.74 43.83,24.74 48.62,19.94 48.62,13.44 50.84,11.22 J6.6
P14_D3/SCL
  Top 0.2: U11.30 9.25,15.12 8.42,15.94 8.42,22.54 11.02,25.14 44.02,25.14 49.02,20.14 49.02,13.94 49.83,13.14 50.74,13.14 J6.5
P15_D4
  Top 0.2: J6.4 49.78,15.78 49.43,16.14 49.43,20.34 44.23,25.54 10.82,25.54 8.03,22.74 8.03,15.54 9.25,14.32 U11.31
P16_D5
  Top 0.2: J6.3 50.44,18.32 49.83,18.94 49.83,20.54 44.43,25.94 10.62,25.94 7.62,22.94 7.62,15.14 9.25,13.52 U11.32
P17_D6
  Top 0.2: J6.2 50.1,20.86 44.62,26.34 10.43,26.34 7.22,23.14 7.22,14.74 9.22,12.74 9.91,12.74 U11.33
P18_D7
  Top 0.2: U11.34 9.15,11.92 6.82,14.24 6.82,23.34 10.22,26.74 44.83,26.74 49.23,22.34 49.78,22.34 J6.1
P19_D8
  Top 0.2: U11.35 9.25,11.12 6.42,13.94 6.42,23.54 10.02,27.14 50.51,27.14 J8.1
P20_D9
  Top 0.2: J8.2 48.37,27.54 9.82,27.54 6.02,23.74 6.02,13.64 9.43,10.24 9.85,10.24 U11.36
P21  (via drill 0.3 pad 0.61)  (1 unrouted)
  Top 0.2: v7.62,41.14 7.62,33.34 8.22,32.74 13.02,32.74 v13.22,32.94 | U11.37 11,9.52 11.22,9.74 11.22,15.34 12.62,16.74 v13.22,16.74
  Bottom 0.2: v13.22,16.74 13.22,17.54 13.62,17.94 13.62,32.54 v13.22,32.94 | 2.66,41.14 v7.62,41.14
P22_D10
  Top 0.2: U11.40 8.75,7.12 7.72,8.14 7.72,10.14 4.82,13.04 4.82,24.34 9.22,28.74 43.23,28.74 44.43,29.94 48.23,29.94 J8.3
P23_D11  (via drill 0.3 pad 0.55)
  Top 0.2: J8.4 50.84,34.35 49.43,32.94 49.43,31.74 48.02,30.34 44.23,30.34 43.02,29.14 9.03,29.14 4.42,24.54 4.42,12.84 7.32,9.94 7.32,7.84 8.85,6.32 U11.41 11.15,6.32 11.32,6.14 14.82,6.14 15.12,6.44 16.42,6.44 v16.52,6.34 16.5,6.32
  Bottom 0.2: 27.92,2.83 HEAD-2*1.2 26.78,1.64 24.23,1.64 19.52,6.34 v16.52,6.34
P24_D12  (via drill 0.3 pad 0.55)
  Top 0.2: J8.5 49.62,36.41 49.62,33.74 49.02,33.14 49.02,31.94 47.83,30.74 44.02,30.74 42.83,29.54 8.82,29.54 4.02,24.74 4.02,12.64 6.92,9.74 6.92,7.64 9.05,5.52 U11.42 15.2,5.52 v15.42,5.74
  Bottom 0.2: v15.42,5.74 15.42,6.34 16.12,7.04 19.42,7.04 22.32,4.14 29.28,4.14 HEAD-2*1.4
P25_D13  (via drill 0.3 pad 0.55, 0.3 pad 0.61)
  Top 0.2: U11.4 20.6,7.12 21.12,7.64 25.23,7.64 26.02,6.84 28.02,6.84 28.52,7.34 v28.52,8.24 | v28.33,32.94 47.23,32.94 48.62,34.34 48.62,39.94 v48.43,40.14 | R37.1 20.31,59.45 20.42,59.34 25.62,59.34 26.83,58.14 29.23,58.14 30.23,57.14 v30.23,53.34
  Bottom 0.2: 28.28,32.89 v28.33,32.94 | v28.33,32.94 27.83,32.44 27.83,9.54 28.52,8.84 v28.52,8.24 28.52,6.54 27.98,5.99 HEAD-2*1.5 | J8.6 48.45,40.17 v48.43,40.14 | v28.33,32.94 28.62,32.94 29.42,33.74 29.42,47.34 29.02,47.74 29.02,49.14 29.23,49.34 29.83,49.34 30.23,49.74 v30.23,53.34
P26_SDA1  (via drill 0.3 pad 0.61)
  Top 0.2: v45.52,52.84 46.62,52.84 46.93,52.54 46.93,51.44 48.73,49.64 49.43,49.64 50.84,48.22 J8.9 48.83,45.77 48.83,41.54 47.62,40.34 47.62,39.34 48.23,38.74 48.23,34.54 47.02,33.34 29.02,33.34 28.42,33.94 v27.83,33.94 | U11.5 19.75,7.94 20.62,7.94 20.73,8.04 25.83,8.04 26.42,7.44 27.62,7.44 v27.73,7.54
  Bottom 0.2: R2.1 44.44,52.84 v45.52,52.84 45.71,53.02 U$3.2 | v27.73,7.54 27.73,8.94 27.42,9.24 27.42,33.54 v27.83,33.94
P27_SCL1  (via drill 0.3 pad 0.61)
  Top 0.2: J8.10 48.64,50.33 47.43,51.54 47.43,53.84 v47.33,53.94 | U11.6 20.95,8.72 21.23,8.44 26.73,8.44 v26.92,8.24 | v26.92,34.74 28.42,34.74 29.42,33.74 46.62,33.74 47.62,34.74 47.62,38.54 47.02,39.14 47.02,40.54 48.23,41.74 48.23,45.94 49.43,47.14 49.43,48.54 v49.23,48.74
  Bottom 0.2: U$3.6 45.21,56.35 45.52,56.04 46.43,56.04 46.62,55.84 46.62,53.94 | 46.62,53.94 46.62,52.84 R4.1 | v47.33,53.94 46.62,53.94 | v26.92,8.24 v26.92,34.74 | v49.23,48.74 49.25,48.74 J8.10
P28_A2  (via drill 0.3 pad 0.61)
  Top 0.2: v11.62,6.94 15.42,6.94 18.02,9.54 19.71,9.54 U11.7 19.75,9.54 20.82,9.54 21.42,8.94 30.83,8.94 32.83,10.94 36.23,10.94 38.22,12.93 A.1 | J7.3 2.66,13.04 3.12,12.94 6.52,9.54 6.52,6.91 7,6.43 v7.1,6.43
  Bottom 0.2: v11.62,6.94 11.12,6.43 v7.1,6.43
P29_A3  (via drill 0.3 pad 0.61)
  Top 0.2: J7.4 4.88,10.58 6.12,9.34 v6.12,5.94 | v12.62,7.64 15.62,7.64 18.23,10.34 19.71,10.34 U11.8 20.85,10.32 21.82,9.34 30.62,9.34 32.62,11.34 36.02,11.34 39.62,14.94 A.2 | 42.83,14.94 A.2 | A.2
  Bottom 0.2: v12.62,7.64 11.32,7.64 10.82,7.14 6.62,7.14 6.12,6.64 v6.12,5.94
P30_A4  (via drill 0.3 pad 0.61)
  Top 0.2: v11.72,8.34 15.62,8.34 18.42,11.14 19.71,11.14 U11.9 20.65,11.12 22.02,9.74 30.23,9.74 31.23,10.74 31.23,12.54 31.62,12.93 B.1 | v5.32,7.24 5.12,7.24 4.32,8.04 J7.5
  Bottom 0.2: v11.72,8.34 11.43,8.34 10.62,7.54 5.82,7.54 v5.32,7.24
P31_A5  (via drill 0.3 pad 0.61)
  Top 0.2: v12.43,9.14 15.82,9.14 18.6,11.92 U11.10 20.45,11.92 22.23,10.14 30.02,10.14 30.83,10.94 30.83,13.94 31.83,14.94 B.2 | 34.02,14.94 B.2 | B.2
  Bottom 0.2: v12.43,9.14 11.29,9.14 10.08,7.94 5.02,7.94 J7.6
PA0
  Top 0.2: U1.10 29.51,42.62 28.62,41.74 20.9,41.74 S1.2
  Top 0.406: S1.2 18.66,38.57 T1.P$1
PA1
  Top 0.2: U1.11 29.6,42.12 28.83,41.34 23.04,41.34 S2.2
  Top 0.406: S2.2 21.2,38.53 T2.P$1
PA2
  Top 0.2: U1.12 29.7,41.62 29.02,40.94 24.42,40.94 23.83,40.34 23.83,39.58 S3.2
  Top 0.406: S3.2 23.73,38.57 T3.P$1
RESET  (via drill 0.3 pad 0.55, 0.3 pad 0.61)
  Top 0.2: R39.1 22.7,6.01 23.33,6.44 28.73,6.44 v29.23,6.94 | v0.92,32.94 0.92,30.24 1.42,29.74 4.02,29.74 4.82,30.54 6.12,30.54 6.62,31.04 16.32,31.04 16.92,30.44 26.73,30.44 26.92,30.64 v28.52,30.64 29.12,30.64 29.42,30.34 42.43,30.34 43.62,31.54 47.02,31.54 v47.62,32.14 | v30.12,48.04 30.62,47.54 34.62,47.54 34.83,47.74 U1.43
  Bottom 0.2: v0.92,32.94 0.92,34.33 J9.6 | v47.62,32.14 48.83,33.34 48.83,38.54 47.62,39.74 47.62,40.54 48.52,41.44 48.52,63.41 49.79,64.68 K-1.1 | v29.23,6.94 29.23,8.84 28.33,9.74 28.33,30.44 v28.52,30.64 28.52,32.14 29.83,33.44 29.83,47.74 v30.12,48.04
RTS/P05  (via drill 0.3 pad 0.61)
  Top 0.2: U11.20 v16.43,19.73 v16.42,19.74
  Top 0.406: S1.1 18.66,37.89 T1.P$2
  Bottom 0.2: v16.42,19.74 16.42,20.74 16.02,21.14 15.42,21.14 15.22,21.34 15.22,32.14 16.42,33.34 16.42,35.34 18.02,36.94 18.64,36.94 S1.1
RX
  Top 0.2: R16.2 25.97,66.43 RX.2
RXD/P08  (via drill 0.3 pad 0.61)
  Top 0.2: U11.23 14.03,17.34 v14.02,17.24 | v14.02,34.74 14.12,34.64 16.12,34.64 16.42,34.34 20.32,34.34 22.94,36.95 S3.1
  Top 0.406: S3.1 23.73,37.85 T3.P$2
  Bottom 0.2: v14.02,34.74 v14.02,17.24
SCLK  (via drill 0.3 pad 0.61)  (1 unrouted)
  Top 0.2: U11.38 8.95,8.72 8.53,9.14 8.53,10.54 5.62,13.44 5.62,23.94 9.62,27.94 44.62,27.94 v45.02,28.34 | S5.1 44.62,37.88 T5.P$1 | T5.P$2 44.62,38.61 S5.2 44.62,42.54 43.3,43.87 R13.1
  Bottom 0.2: v45.02,28.34 45.02,36.55 S5.1
SDIO  (via drill 0.3 pad 0.61)  (1 unrouted)
  Top 0.2: U11.39 8.55,7.92 8.12,8.34 8.12,10.34 5.22,13.24 5.22,24.14 9.43,28.34 43.83,28.34 v44.12,28.64 | T6.P$2 S6.2 42.74,40.15 R12.1 | S6.1 T6.P$1
  Bottom 0.2: S6.1 42.81,36.95 44.62,35.14 44.62,29.14 v44.12,28.64
STM_JTCK  (via drill 0.3 pad 0.61)
  Top 0.2: U1.37 37.83,47.94 37.02,47.14 35.42,47.14 v35.23,46.94
  Bottom 0.2: JTCK.P$1 35.17,46.89 v35.23,46.94
STM_JTMS  (via drill 0.3 pad 0.61)
  Top 0.2: U1.34 37.87,46.12 v37.65,45.89
  Bottom 0.2: JTMS.P$1 37.23,45.48 v37.65,45.89
SWDCLK
  Top 0.2: U1.26 40.51,42.12 40.73,42.34 40.73,43.44 41.02,43.74 41.56,43.74 R13.2
SWDIO
  Top 0.2: U1.27 38.8,42.62 38.52,42.34 38.52,41.24 38.62,41.14 40.73,41.14 40.93,41.34 41.56,41.34 R12.2 41.69,41.62 R14.1
TX
  Top 0.2: R15.2 30.18,66.47 TX.2
TXD/P06  (via drill 0.3 pad 0.61)
  Top 0.2: 15.63,20.53 v15.62,20.34 v15.63,20.33 U11.21 | S4.1 25.84,36.95 24.62,35.74 22.42,35.74 20.62,33.94 v15.62,33.94
  Top 0.406: S4.1 T4.P$2 | T4.P$2
  Bottom 0.2: v15.62,20.34 15.22,20.34 14.82,20.74 14.82,33.14 v15.62,33.94
USB5V
  Top 0.2: R21.2 R40.2 41.87,51.09 41.33,51.64 41.33,55.86 RES1.2
  Top 0.813: Q7.3 36.57,53.28 39.62,56.34 RES1.2
USB_RENUMN
  Top 0.2: U1.38 37.33,50.18 R23.2
USBPON
  Top 0.2: U$19.1 32.22,58.78 R24.1 32.36,54.7 32.52,54.54 32.65,54.54 Q7.1
VDD  (via drill 0.3 pad 0.61, 0.5 pad 0.81)
  Top 0.2: v25.23,14.14 22.89,14.14 C2.1 21.8,14.81 21.32,14.34 19.75,14.34 U11.13
  Top 0.406: C23.1 L20.1 12.62,34.74 14.43,32.94 v26.02,32.94 | C7.1 21.06,6.32 U11.3 21.3,6.32 v21.82,6.84
  Bottom 0.2: v25.23,14.14 26.02,14.14
  Bottom 0.406: v21.82,6.84 25.12,6.84 26.02,7.74 26.02,14.14 v26.02,32.94
VIN  (via drill 0.8 pad 1.02)
  Top 0.2: R35.1 R26.1 20.42,62.52 20.42,63.74 19.82,64.34 13.43,64.34 12.43,63.34 12.43,56.34 | R25.1 15.16,57.04 C24.2 15.06,56.58 14.82,56.34 12.43,56.34 | IN5819.1 10.27,54.19 12.43,56.34
  Top 0.813: v5.02,32.94 5.02,46.34 7.62,48.94 7.62,53.14 8.22,53.74 10.08,53.74 IN5819.1
  Top 1.016: J5.P$1 8.66,57.9 10.43,56.14 10.43,54.08 IN5819.1
  Bottom 0.813: J9.1 3.17,23.28 5.02,25.14 v5.02,32.94
VIN+
  Top 0.2: R29.1 R28.1 | MP2359.5 17.13,53.43 16.42,54.14 15.72,54.14 15.42,54.44 15.42,56.34 16.73,57.64 18.17,57.64 18.34,57.8 R28.1 | R28.1 18.34,58.05
  Top 0.406: C41.1 13.79,52.58 15.42,50.94 16.62,50.94 17.13,51.44 MP2359.5
  Top 0.813: IN5819.2 10.27,49.99 12.82,52.54 13.66,52.54 C41.1

## Text on the board
tPlace: ON | L | RX | TX | RedBear.cc | Blend v2.0 | B | A | DIGITAL | NFC | GND | GND | VCC | V33 | A5 | A3 | A4 | A2 | MISO | RST | SCK | TX | SPI | RX | GND | MOSI | 5V
bPlace: P27 | P26 | P02 | GND | P21 | JTCK | JTMS | M_RST | P25 | REF | P24 | RST | P23 | V33 | P22 | 5V | P20 | GND | P19 | GND | VIN | P18 | P17 | P03 | P16 | P04 | P15 | P28 | P14 | P29 | P13 | P30 | P12 | P31 | P11
tNames: RESET | SCL | SDA | AREF | GND | P21 | 13 | IOREF | 12 | RESET | BTRXD | BTTXD | BTVDD | BTRTS | BTCTS | SDIO | SCLK | 11 | 3.3V | 10 | 5V | 9 | GND | POWER | 8 | GND | VIN | 7 | 6 | A0 | 5 | A1 | ANALOG IN | 4 | A2 | 3 | A3 | 2 | A4 | 1 | A5 | 0